# EAGLE board skripsi mas ramdan (EAGLE 9.6.2)
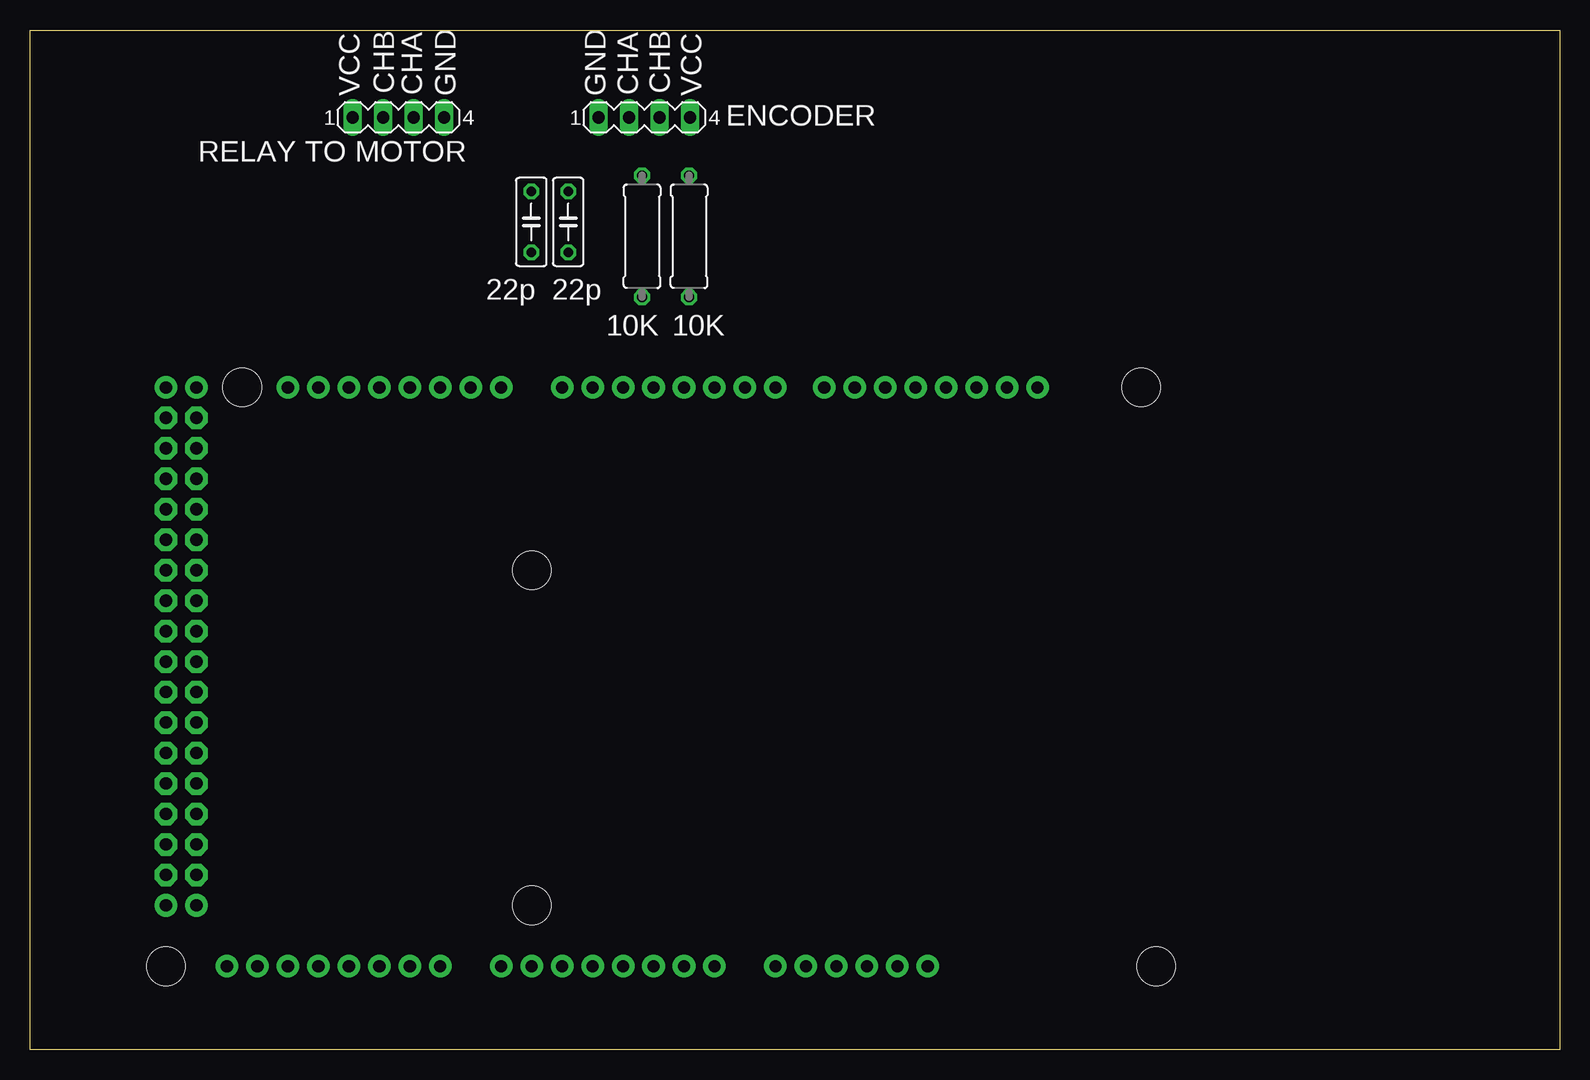
[diagram p0: board, top side]
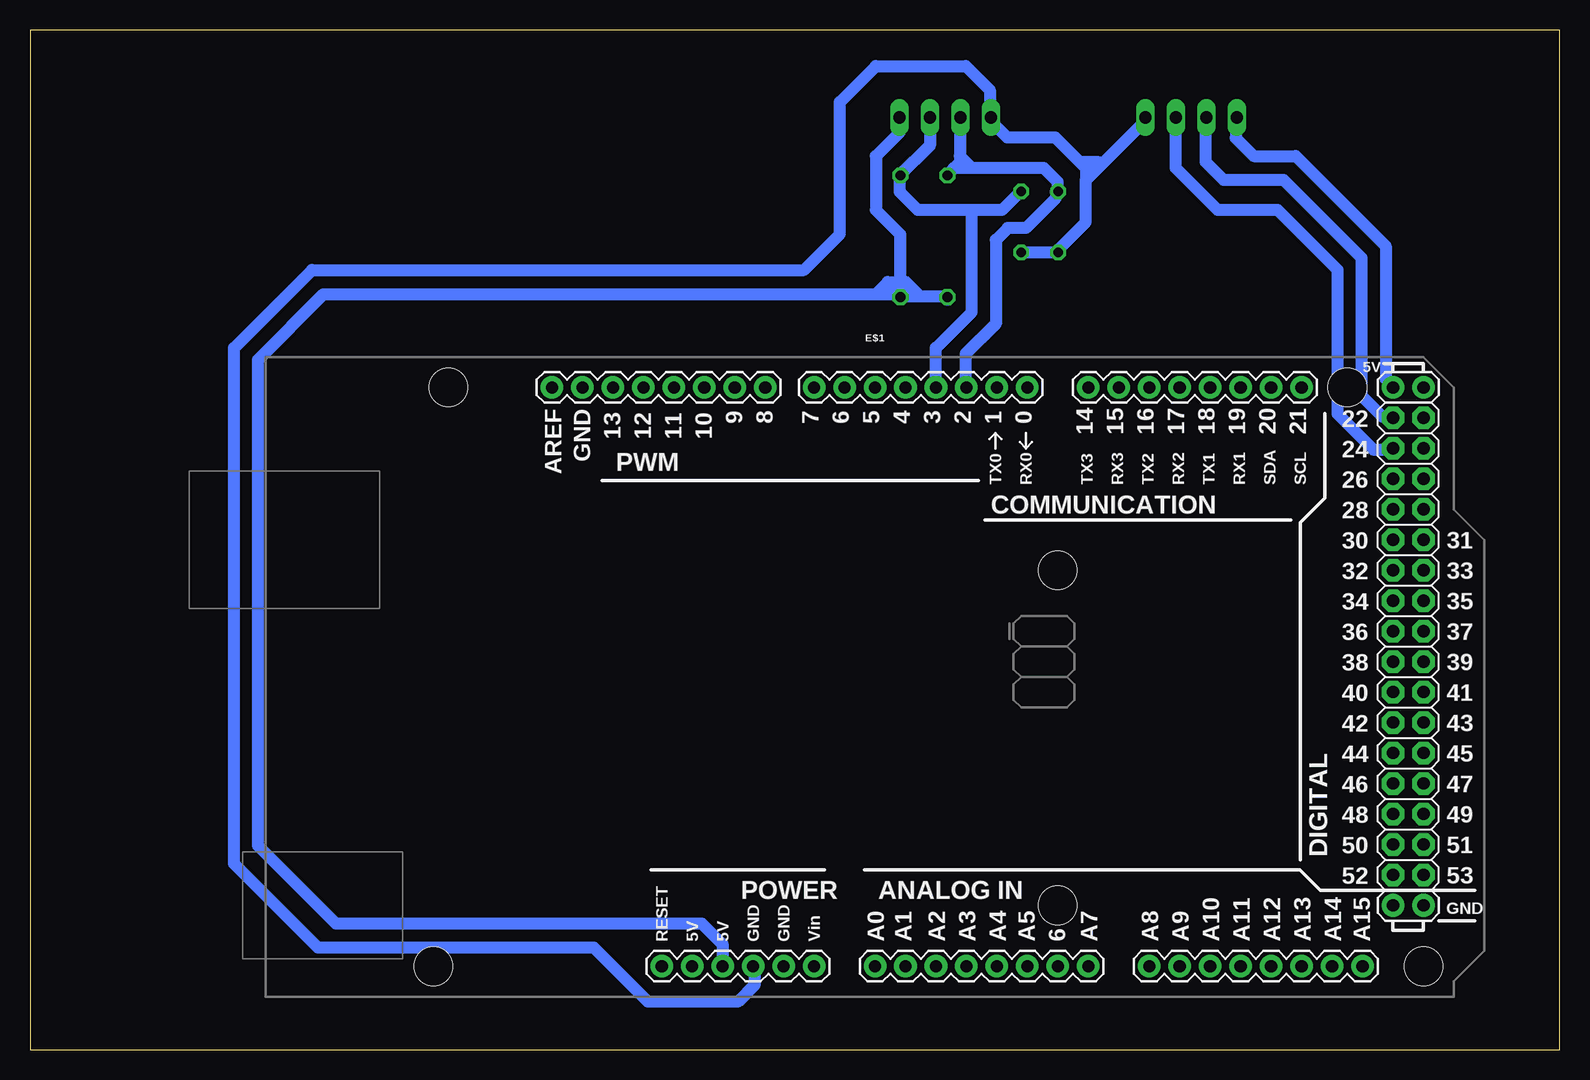
[diagram p1: board, bottom side, seen from below]

Size 127.5 x 85 mm. Coordinates in mm from the lower left corner, seen from the top.
Outline: 0,85 127.5,85 127.5,0 0,0 0,85
Copper layers (1*16): Top 0.035mm / dielectric 1.5mm / Bottom 0.035mm
Design rules "default": minimum track width 6mil, minimum drill 0.35mm, track to track 6mil, track to pad 6mil, pad to pad 6mil, via to via 6mil, smd to smd 6mil, copper to edge 40mil, drill to drill 6mil, minimum pad ring 10mil, minimum via ring 8mil, stop-mask expansion 4mil, vias tented up to drill 0mil, thermal gap 10mil

## Footprints (pad centres in the part's own frame; a part is rotated, then mirrored left to right if it is on the bottom)
ARDUINO_MEGA = drill 1.016 pad 1.88: 0 13.97,24.13; 1 11.43,24.13; 2 8.89,24.13; 3 6.35,24.13; 3.3V -13.97,-24.13; 4 3.81,24.13; 5 1.27,24.13; 5V@0 -11.43,-24.13; 5V@1 44.45,24.13; 5V@2 46.99,24.13; 6 -1.27,24.13; 7 -3.81,24.13; 8 -7.874,24.13; 9 -10.414,24.13; 10 -12.954,24.13; 11 -15.494,24.13; 12 -18.034,24.13; 13 -20.574,24.13; 14 19.05,24.13; 15 21.59,24.13; 16 24.13,24.13; 17 26.67,24.13; 18 29.21,24.13; 19 31.75,24.13; 20 34.29,24.13; 21 36.83,24.13; A0 1.27,-24.13; A1 3.81,-24.13; A2 6.35,-24.13; A3 8.89,-24.13; A4 11.43,-24.13; A5 13.97,-24.13; A6 16.51,-24.13; A7 19.05,-24.13; A8 24.13,-24.13; A9 26.67,-24.13; A10 29.21,-24.13; A11 31.75,-24.13; A12 34.29,-24.13; A13 36.83,-24.13; A14 39.37,-24.13; A15 41.91,-24.13; AREF -25.654,24.13; GND@0 -8.89,-24.13; GND@1 -6.35,-24.13; GND@2 44.45,-19.05; GND@3 46.99,-19.05; GND@4 -23.114,24.13; RESET -16.51,-24.13; VIN -3.81,-24.13 | drill 1.016 pad 1.88 octagon: 22 44.45,21.59; 23 46.99,21.59; 24 44.45,19.05; 25 46.99,19.05; 26 44.45,16.51; 27 46.99,16.51; 28 44.45,13.97; 29 46.99,13.97; 30 44.45,11.43; 31 46.99,11.43; 32 44.45,8.89; 33 46.99,8.89; 34 44.45,6.35; 35 46.99,6.35; 36 44.45,3.81; 37 46.99,3.81; 38 44.45,1.27; 39 46.99,1.27; 40 44.45,-1.27; 41 46.99,-1.27; 42 44.45,-3.81; 43 46.99,-3.81; 44 44.45,-6.35; 45 46.99,-6.35; 46 44.45,-8.89; 47 46.99,-8.89; 48 44.45,-11.43; 49 46.99,-11.43; 50 44.45,-13.97; 51 46.99,-13.97; 52 44.45,-16.51; 53 46.99,-16.51 | hole 3.2: -34.29,24.13; -35.56,-24.13; 16.51,8.89; 16.51,-19.05; 40.64,24.13; 46.99,-24.13
MA04-1 = drill 1.016 long: 1 -3.81,0; 2 -1.27,0; 3 1.27,0; 4 3.81,0
0309/10 = drill 0.813 octagon: 1 -5.08,0; 2 5.08,0
C050-025X075 = drill 0.813 octagon: 1 -2.54,0; 2 2.54,0

## Placement (x,y rotation side)
E$1  [ARDUINO_MEGA]  58.33,31.07 0 bottom
E$2  [MA04-1]  51.21,77.71 0 top
E$3  [0309/10]  54.94,67.8 90 top
E$4  [0309/10]  51.02,67.8 90 top
E$5  [C050-025X075]  41.79,69 90 top
E$6  [C050-025X075]  44.87,69 90 top
E$7  [MA04-1]  30.71,77.71 0 top

## Library data of the parts
E$1 = SparkFun-Boards
E$2 E$7 = con-lstb
E$3-E$6 = rcl

## Tracks (layer width: path | path; a pad name or v marks a point on that pad's centre or on a via)
S$1
  Bottom 1: 55,78 55,76.5 57,74.5 57,70 54.97,67.97 54.97,62.8 51.3,62.8 51,62.5
S$2
  Bottom 1: 49,73.5 43,73.5 41.84,72.34 41.84,71.65 | 49,73.5 50.5,73.5 | 50.5,73.5 51,73 | 50,77.5 50,74.5 | 50,74.5 50,74 50.5,73.5 | 49,73.5 50,74.5
S$3
  Bottom 1: 52.5,78 52.5,75.35 55.01,72.84
S$4
  Bottom 1: 52,55.5 52,58.5 49,61.5 49,70 | 49,70 53.5,70 55,71.5 55,73 | 45,71.5 46.5,70 49,70
S$5
  Bottom 1: 42,71.5 42,71 44.5,68.5 46,68.5 47,67.5 47,60.5 49.51,57.99 49.51,55.33
S$6
  Bottom 1: 14,53 14,52.91 13.86,52.77 14.77,52.77 16.5,54.5 16.5,66 23,72.5 28,72.5 29.5,74 29.5,78
S$7
  Bottom 1: 69.74,6.91 69.74,8.74 71.5,10.5 102,10.5 108.5,17 108.5,57.5 103.04,62.96 54.85,62.96 55,63.11 55,64 | 57,63 56,64 55,64 | 55,64 54.5,64 53.5,63
S$8
  Bottom 1: 67.1,6.98 67.1,5.4 68.5,4 76,4 80.5,8.5 103.5,8.5 110.5,15.5 110.5,58.5 104,65 63,65 60,68 60,79 57,82 49.5,82 47.5,80 47.5,77.5 46.03,76.03 42.03,76.03 40,74 | 45,66.5 42,66.5 39.5,69 39.5,72.5 | 39.5,73.5 40,74 | 34.5,77.5 38,74 | 38,74 38.5,73.5 | 38.5,73.5 39.5,73.5 | 39.5,73.5 39.5,72.5 | 39.5,72.5 38.5,73.5 | 38.5,73.5 38.5,74 | 38.5,74 40,74 | 38.5,74 38,74
S$9
  Bottom 1: 14,50 15.5,50 18.5,53 18.5,65 23.5,70 28.5,70 32,73.5 32,78
S$10
  Bottom 1: 27,78 27,76 25.5,74.5 22,74.5 14.5,67 14.5,55.9 13.94,55.34

## Text on the board
tNames: CHB | CHA | CHA | CHB | VCC | GND | GND | VCC | ENCODER | RELAY TO MOTOR | 22p | 22p | 10K | 10K